# Altium PCB 红外解码.PcbDoc
Units mil, origin at the board's own origin, x right, y up, seen from the top; angles counter-clockwise.
Board outline 6000 x 4000 mil, 2 copper layers (Top Layer, Bottom Layer); 8 components, 5 nets, 17 pads, 2 vias.
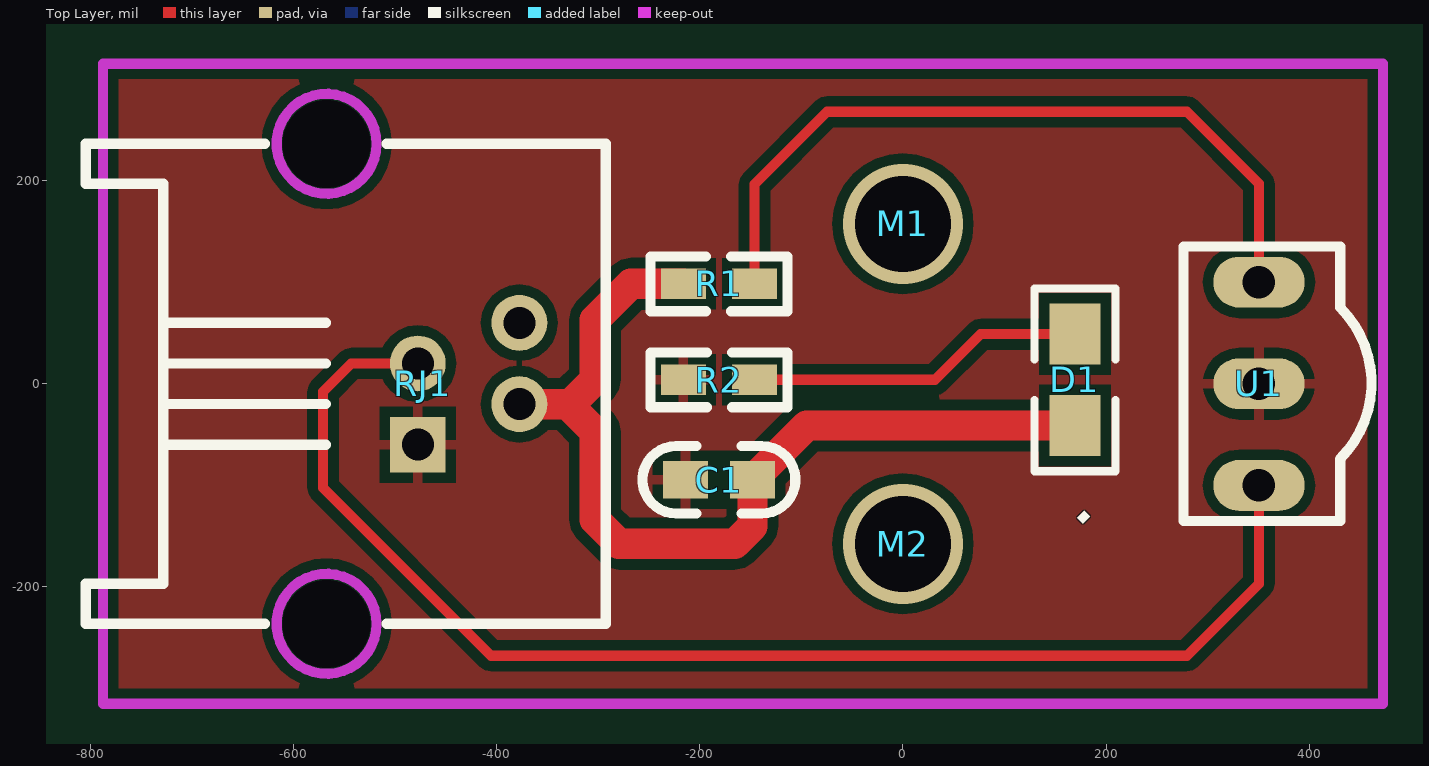
[diagram p0: Top Layer view]
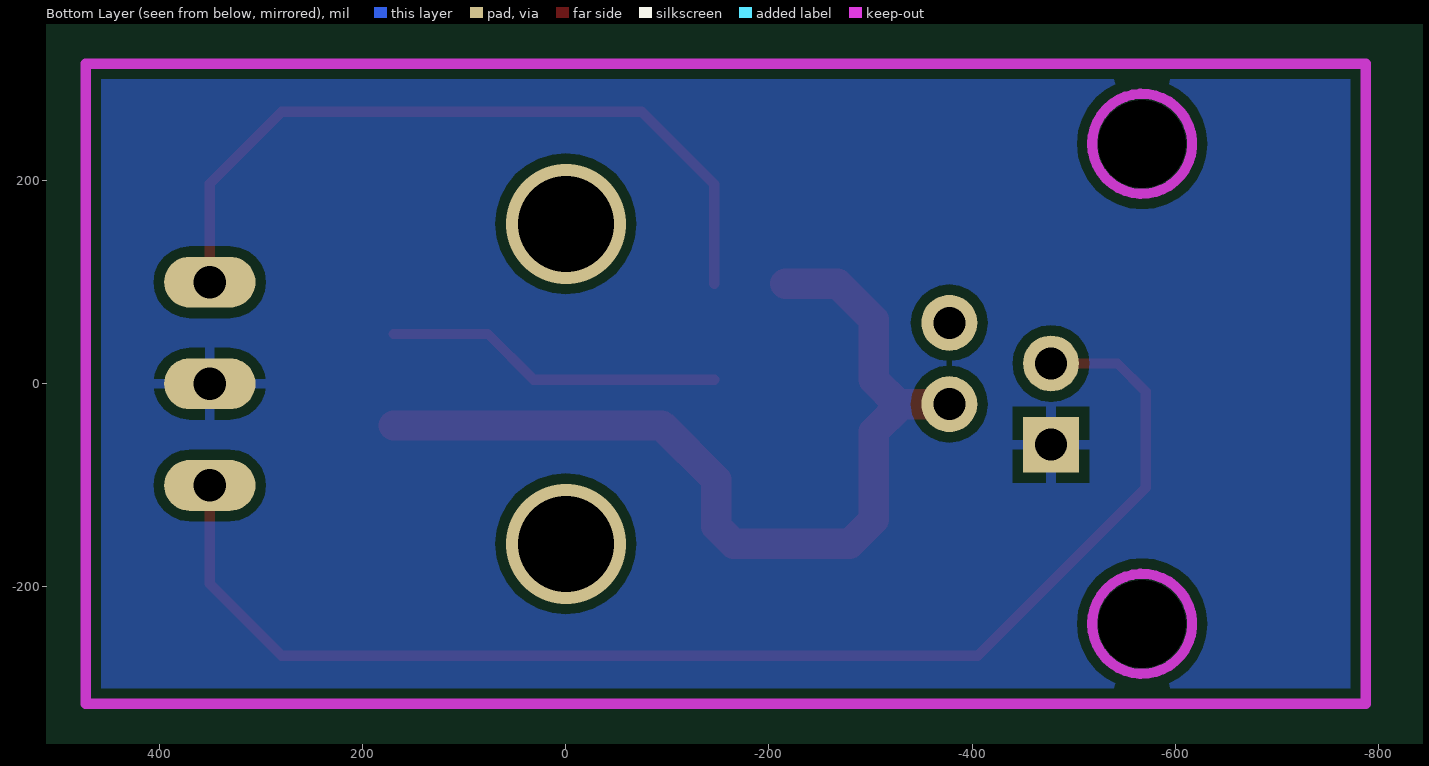
[diagram p1: Bottom Layer view, seen from below]

## Layer stack, top to bottom
Top Solder: solder mask 0.4, Solder Resist, Dk 3.5
Top Layer: signal copper 1.4
Dielectric 1: dielectric 12.6, FR-4, Dk 4.8
Bottom Layer: signal copper 1.4
Bottom Solder: solder mask 0.4, Solder Resist, Dk 3.5

## Board outline
-3409.45,-2464.57 2590.55,-2464.57 2590.55,1535.43 -3409.45,1535.43

## Design rules (kind name [scope] priority, off if disabled: settings)
Clearance [All] p1: gap=10
PolygonConnect [All] p1: connectstyle=Relief reliefconductorwidth=10 reliefentries=4 polygonreliefangle="90 Angle" airgapwidth=10
RoutingVias [All] p1: holewidth=28 width=50 viastyle="Through Hole" minholewidth=28 minwidth=50 maxholewidth=28 maxwidth=50
SolderMaskExpansion [All] p1: expansion=4
Width [All] p1: maxlimit=100 minlimit=10 preferedwidth=10
29 further rules are at their usual default settings.

## Components (designator, comment, footprint, x,y, rotation, side; value= is the part's Value field where it differs from the comment)
C1 "Cap" 0603_C -181.1,-94.49 r270 top
D1 "LED" 0805 169.29,3.94 r0 top
M1 "M2" M2 0,157.48 r0 top
M2 "M2" M2 0,-157.48 r0 top
R1 "Res2" 0603_R -181.1,98.43 r270 top
R2 "Res2" 0603_R -181.1,3.94 r90 top
RJ1 "RJ11" RJ11 -472.44,0 r90 top
U1 "1838" 1838 350.39,0 r90 top

## Footprints (in the part's own frame and the unit in brackets; to place one, negate y for a bottom-side part, rotate by r counter-clockwise, add the part's x,y. Pads: shape width x height; smd on the part's side, far side on the other; paste and mask are expansions set on the pad)
0603_C [mil]
  rect 37x44 smd: 1(0,-33) 2(0,33)
  silkscreen extent -33,-75 33,75
0603_R [mil]
  rect 30x44 smd: 1(0,35) 2(0,-35)
  silkscreen extent -27,-67 27,68, body extent -19,-52 20,50, height 21
0805 [mil]
  rect 50x60 smd: 1(0,-45) 2(0,45)
  silkscreen extent -40,-90 40,90
1838 [mil]
  oval 50x90 hole 32: 1(-100,0) 2(0,0) 3(100,0)
  silkscreen extent -135,-111 135,74
M2 [mil]
RJ11 [mm]
  round 2.1 hole 2.2 unplated: 0(-6,2.41) 0(6,2.41)
  rect 1.397x1.397 hole 0.8: 1(-1.524,0.13)
  round 1.397 hole 0.8: 2(-0.508,-2.41) 3(0.508,0.13) 4(1.524,-2.41)
  Keep-Out Layer circle w0.254: c-6,2.41 r1.25
  Keep-Out Layer circle w0.254: c6,2.41 r1.25
  silkscreen extent -6,-4.57 6,8.43

## Part data
C1: "Capacitor"
D1: library part LED1, "Typical RED GaAs LED"
M1 M2: library part M3
R1 R2: "Resistor"

## Via types
v1: diameter 118.11, hole 94.49, Top Layer to Bottom Layer, 2 vias

## Nets (pads, with @x,y where several pads share a name; then routed paths per layer and width w, separated by ;. In a path a pad name is that pad's centre, name@x,y a point inside that pad or via, vN(x,y) a via of type N, cw(c..) or ccw(c..) an arc to the next point about the centre after c; other vN are vias at no path point)
GND: C1.1 R2.1 RJ1.1 U1.2
NetD1_2: D1.2 R2.2 | length 334
  Top Layer w10: R2.2 31.5,3.94 76.5,48.94 D1.2
NetR1_1: R1.1 U1.3 | length 750.2
  Top Layer w10: R1.1 -146.1,196.42 -74.8,267.72 279.53,267.72 350.39,196.85 U1.3
OUT: RJ1.3 U1.1 | length 1315.3
  Top Layer w10: RJ1.3 -542.99,20 -570.87,-7.87 -570.87,-102.36 -405.51,-267.72 279.53,-267.72 350.39,-196.85 U1.1
VCC: C1.2 D1.1 R1.2 RJ1.2 | length 927.5
  Top Layer w30: RJ1.2 -327.09,-20 -303.15,3.94 -303.15,62.99 -267.72,98.43 R1.2 ; -330.39,-20 -303.15,-47.24 -303.15,-133.86 -279.53,-157.48 -165.35,-157.48 -148.1,-140.23 C1.2 -94.68,-41.06 D1.1
pads on no net: RJ1.0 RJ1.4
copper on no net:
  other v1: 0,-157.48 0,157.48

## Polygon pours and split planes (outlines as drawn)
GND on Top Layer "Top Layer-No Net" (solid, remove dead copper, pour order 2): -826.77,354.33 -822.83,350.39 500,350.39 500,-350.39 511.81,-362.2 492.13,-342.52 -814.96,-342.52
GND on Bottom Layer "Top Layer-No Net" (solid, remove dead copper, pour order 4): -826.77,354.33 535.43,354.33 539.37,350.39 515.75,326.77 515.75,-354.33 -814.96,-354.33

## Keep-outs
Keep-Out Layer:
  lines w10: -787.4,-314.96 472.44,-314.96 472.44,314.96 -787.4,314.96 -787.4,-314.96

## Silkscreen, mask and mechanical layers (free items; w line width, h text height)
Top Overlay:
  text "." at 165.35,-125.98 h60 r315

## Text inside footprints (layer, text, board x,y; h text height)
RJ1: Mechanical 1 "1" at -568.11,-70 h39.37 r270; Mechanical 1 "2" at -348.11,-30 h39.37 r270; Mechanical 1 "3" at -568.11,10 h39.37 r270; Mechanical 1 "4" at -348.11,50 h39.37 r270; Mechanical 1 "1" at -748.11,-80 h39.37 r270; Mechanical 1 "4" at -748.11,60 h39.37 r270